# Altium PCB AND_4x4.PcbDoc
Units mil, origin at the board's own origin, x right, y up, seen from the top; angles counter-clockwise.
Board outline 3165 x 2605 mil, 2 copper layers (Top Layer, Bottom Layer); 10 components, 11 nets, 38 pads, 4 vias.
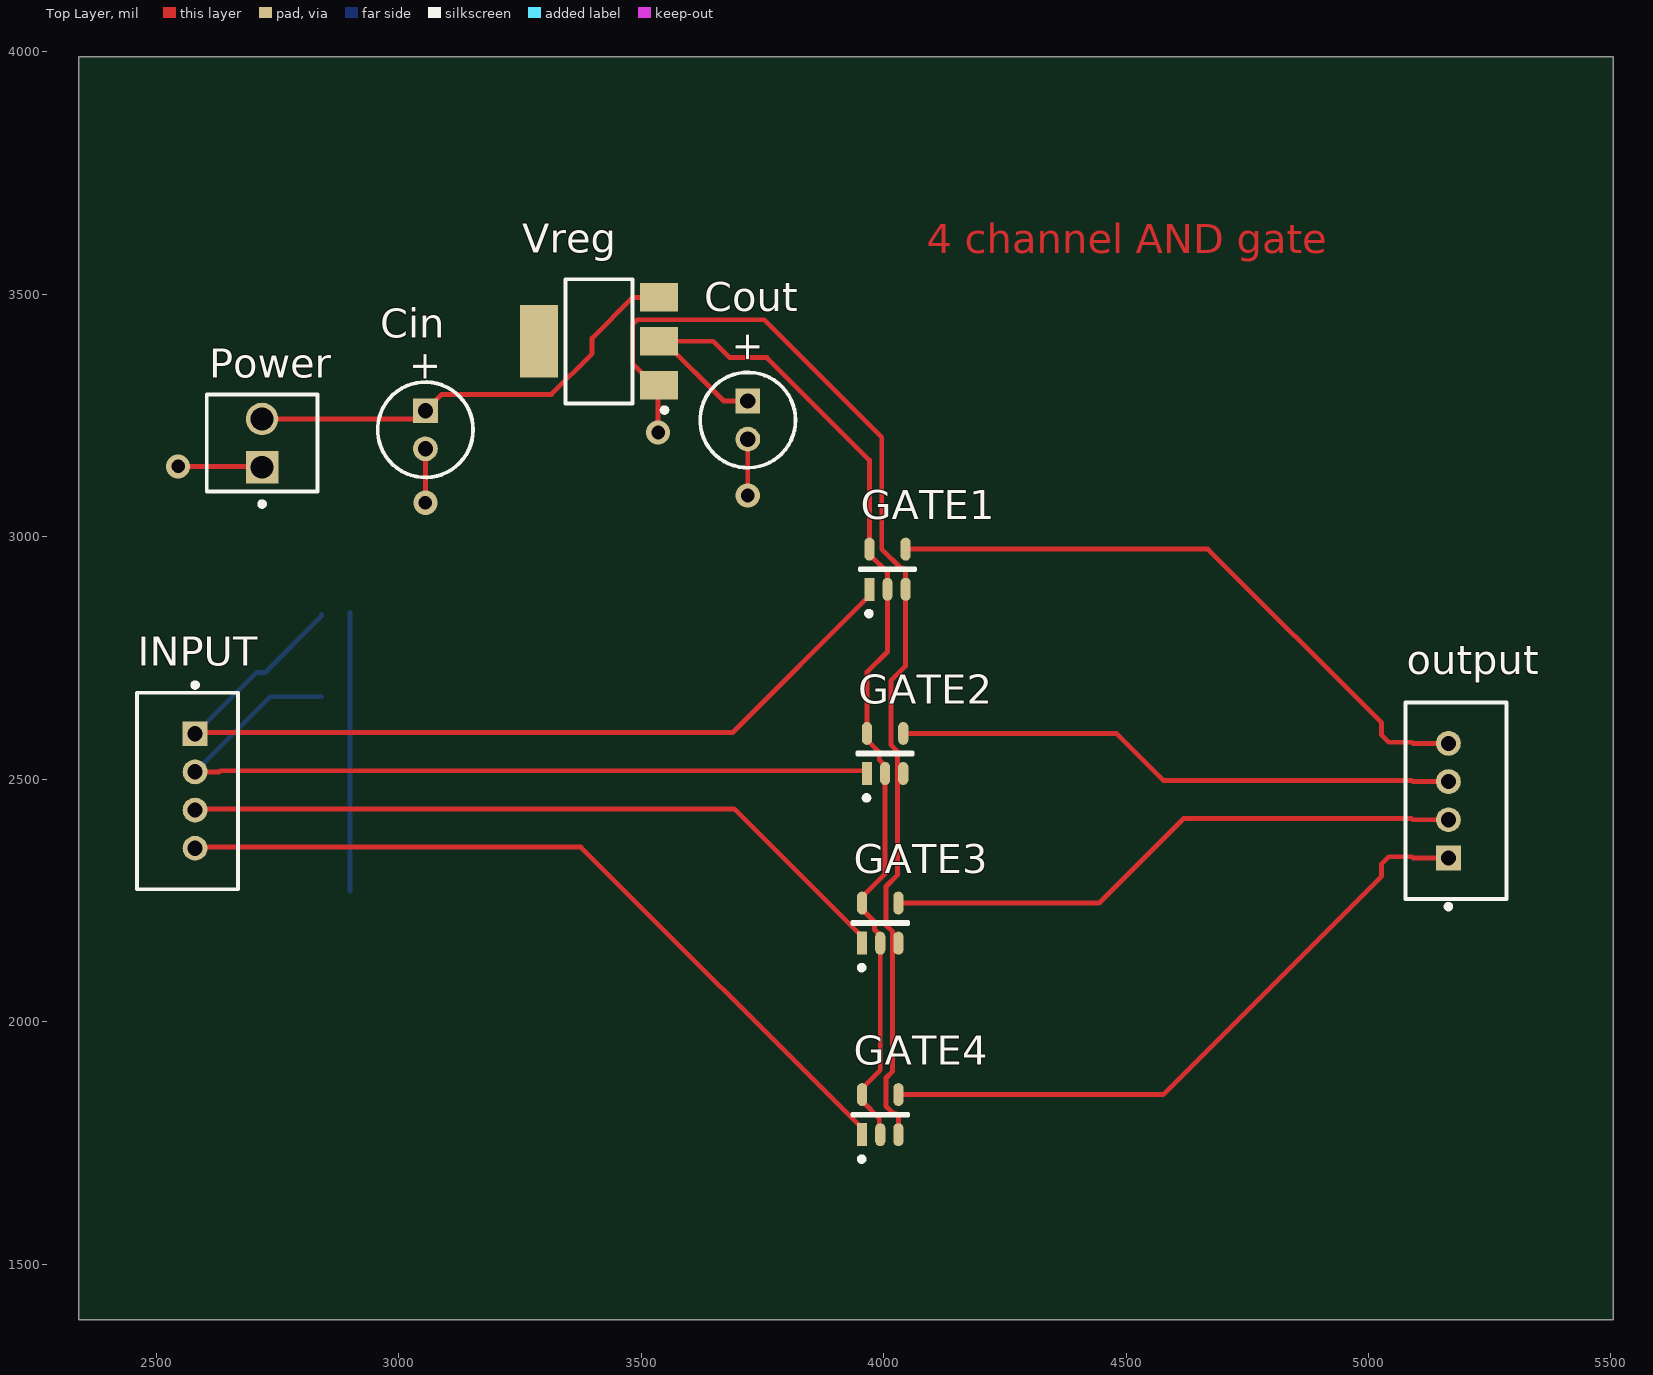
[diagram p0: Top Layer view]
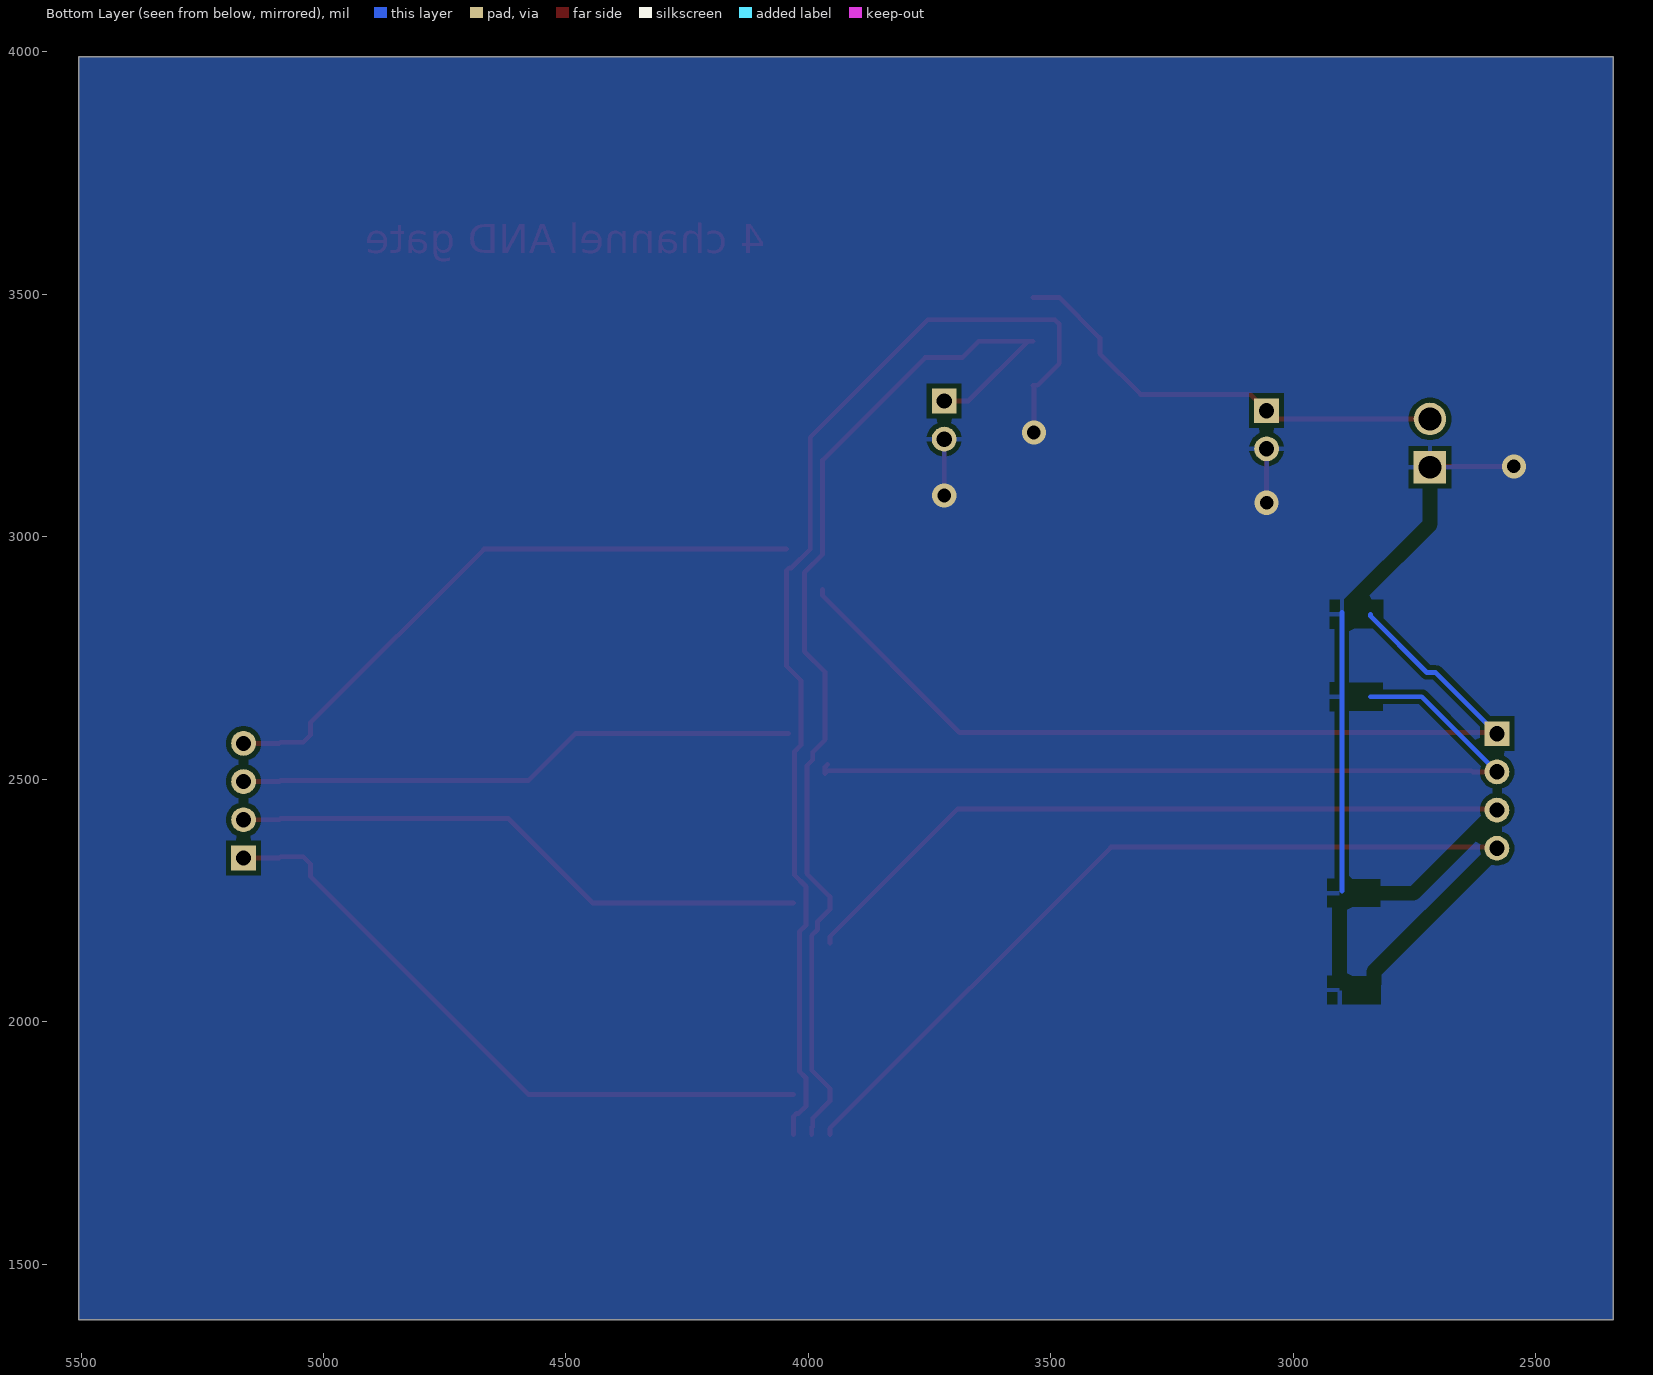
[diagram p1: Bottom Layer view, seen from below]

## Layer stack, top to bottom
Top Solder: solder mask 0.4, Solder Resist, Dk 3.5
Top Layer: signal copper 1.4
Dielectric 1: dielectric 12.6, FR-4, Dk 4.8
Bottom Layer: signal copper 1.4
Bottom Solder: solder mask 0.4, Solder Resist, Dk 3.5

## Board outline
2340,1385 5505,1385 5505,3990 2340,3990

## Design rules (kind name [scope] priority, off if disabled: settings)
Clearance [All] p1: gap=10 ignorepadtopadclearanceinfootprint=FALSE except(0: Arc-Hole Track-Hole SMDPad-Hole THPad-Hole Via-Hole Fill-Hole Poly-Hole Region-Hole Text-Hole)
PolygonConnect [All] p1: connectstyle=Relief reliefconductorwidth=10 reliefentries=4 polygonreliefangle="90 Angle" airgapwidth=10
RoutingVias [All] p1: holewidth=28 width=50 viastyle="Through Hole" minholewidth=28 minwidth=50 maxholewidth=28 maxwidth=50
SolderMaskExpansion [All] p1: expansion=4 istentingtop=FALSE
SupplyNets "Schematic Supply Nets" [InNet('GND')] p1: voltage=0.000
Width [All] p1: maxlimit=10 minlimit=10 preferedwidth=10
30 further rules are at their usual default settings.

## Components (designator, comment, footprint, x,y, rotation, side; value= is the part's Value field where it differs from the comment)
Cin "ECA1HM100" CAPPR55-200-1100X500X1200 3055,3220.63 r270 top value=10µF
Cout "ECA1HM100" CAPPR55-200-1100X500X1200 3720,3240.63 r270 top value=10µF
GATE1 "SN74AUP1G08DBVR" FP-DBV0005A-IPC_C 4008.13,2933.01 r90 top
GATE2 "SN74AUP1G08DBVR" FP-DBV0005A-IPC_C 4003.13,2553.01 r90 top
GATE3 "SN74AUP1G08DBVR" FP-DBV0005A-IPC_C 3993.13,2203.01 r90 top
GATE4 "SN74AUP1G08DBVR" FP-DBV0005A-IPC_C 3993.13,1808.01 r90 top
INPUT "110990030" FP-110990030-MFG 2564.25,2475.63 r270 top
output "110990030" FP-110990030-MFG 5180.75,2455.63 r90 top (schematic designator OUTPUT)
Power "22-27-2021" MOLX-22-27-2021_V 2718.13,3193.01 r90 top
Vreg "NCP1117ST33T3G" ONSC-SOT-223-4-318H-01_A_V 3413.13,3403.01 r180 top

## Footprints (in the part's own frame and the unit in brackets; to place one, negate y for a bottom-side part, rotate by r counter-clockwise, add the part's x,y. Pads: shape width x height; smd on the part's side, far side on the other; paste and mask are expansions set on the pad)
CAPPR55-200-1100X500X1200 [mm] "THD, 2-Leads, Dia 5mm, Pin Spacing 2mm"
  rect 1.3x1.3 hole 0.8: 1(-1,0)
  round 1.3 hole 0.8: 2(1,0)
  silkscreen extent -2.5,-2.5 2.5,2.5, body extent -2.5,-2.5 2.45,2.5, height 12
FP-110990030-MFG [mm]
  rect 1.3x1.3 hole 0.8 paste-2539.97 mask+0: 1(-3,0.4)
  round 1.3 hole 0.8 paste-2539.97 mask+0: 2(-1,0.4) 3(1,0.4) 4(3,0.4)
  silkscreen extent -5.67,-2.65 5.15,2.65, body extent -5.25,-2.75 5.25,2.75, height 0.25
FP-DBV0005A-IPC_C [mm]
  rect 1.205x0.532 smd paste+0 mask+0: 1(-1.05,0.95)
  rrect100% 1.205x0.532 smd paste+0 mask+0: 2(-1.05,0) 3(-1.05,-0.95) 4(1.05,-0.95) 5(1.05,0.95)
  silkscreen extent -2.45,-1.45 0.05,1.45, body extent -1.75,-1.55 1.75,1.55, height 0.25
MOLX-22-27-2021_V [mm] "Header, 2-Leads, Body 5.8x5.08mm"
  rect 1.7x1.7 hole 1.19: 1(-1.27,0)
  round 1.7 hole 1.19: 2(1.27,0)
  silkscreen extent -3.31,-2.9 2.54,2.9, body extent -2.54,-2.9 2.54,2.9, height 11.72
ONSC-SOT-223-4-318H-01_A_V [mm] "SOT223, 4-Leads, Body 6.5x3.5mm, Pitch 2.3mm"
  rect 2x1.5 smd: 1(-3.15,2.3) 2(-3.15,0) 3(-3.15,-2.3)
  rect 2x3.8 smd: 4(3.15,0)
  silkscreen extent -3.55,-3.25 1.75,3.72, body extent -1.75,-3.25 1.75,3.25, height 1.8

## Part data
Cin Cout: library part CMP-001-00025-7, "Aluminum Electrolytic Capacitor, 10 uF, +/- 20%, 50 V, -40 to 85 degC, 2-Pin THD, RoHS, Bulk", Capacitor Type=Electrolytic, Case/Package=Radial, Manufacturer=Panasonic, Max Operating Temperature=85°C, Min Operating Temperature=-40°C, Package Description="2-Pin Radial Lead, Dia 5 mm, Height 12 mm", Package Quantity=200, Package Reference=CAPPR55-200-1100X500X1200, Ripple Current=65mA, Tolerance=20%, Voltage Rating=50V, Datasheet URL=https://industrial.panasonic.com/cdbs/www-data/pdf/RDF0000/ABA0000C1218.pdf, Datasheet Version="Rev. 05, 10/2016", Diameter=5mm, Lead Pitch=2mm, Manufacturer URL=http://www.panasonic.com/, Mounting Technology=TH, Packaging=Bulk, Pins=2, Ripple Current (AC)=65mA, RoHS Compliant=True
GATE1 GATE2 GATE3 GATE4: library part CMP-0859-00066-4, "IC GATE AND 1CH 2-INP SOT23-5", Case/Package=SOT-23, High Level Output Current=-4mA, Low Level Output Current=4mA, Max Operating Temperature=85°C, Max Supply Voltage=3.6V, Min Operating Temperature=-40°C, Min Supply Voltage=800mV, Package Quantity=3000, Quiescent Current=500nA, Contact Plating=Tin, Input Type="SCHMITT TRIGGER", Lead Free="Lead Free", Logic Function="AND GATE", Mount="Surface Mount", Number of Bits=1, Number of Circuits=1, Number of Elements=1, Number of Gates=1, Number of Input Lines=2, Number of Inputs=2, Number of Output Lines=1, Number of Outputs=1, Number of Pins=5, Output Current=4mA, Packaging="Tape and Reel", Propagation Delay=6.2ns, Radiation Hardening=No, REACH SVHC="No SVHC", RoHS Compliant=Yes, Series=74AUP, Technology=CMOS, Turn-On Delay Time=20.9ns, Weight=0.000395oz
INPUT output: library part CMP-139044-000001-1, "GROVE 2MM 4PIN VERT CONN 10PCS", Series=-
Power: library part CMP-2000-05537-1, "Male Header, Pitch 2.54 mm, 1 x 2 Position, Height 11.7 mm, Tail Length 3.56 mm, 0 to 75 degC, RoHS, Bulk", Current - Max=4A, Manufacturer=Molex, Operating temperature=0°Cto+75°C, Package Description="2-Leads Header, Body 5.08 x 5.8 mm, Pitch 2.54 mm", Package Version="Rev. BC, 02/2012", PartNumber=0022272021, Voltage - Max=250V, Contact Material=Tinplatedbrass, Current Rating=4A, Datasheet URL=http://www.molex.com/pdm_docs/sd/022272021_sd.pdf, Datasheet Version="Rev. F, 06/2009", Housing Material=Nylon(UL94V-0), Manufacturer URL=http://www.molex.com/, Mounting Technology=ThroughHole, No. of Positions=2, No. of Rows=1, Orientation=Vertical, Package Reference=22-27-2021, Pitch=2.54mm, Voltage Rating=250V
Vreg: library part CMP-1679-00010-1, "Low-Dropout Positive Fixed Voltage Regulator, 1 A, 3.3 V Output Voltage, 0 to 125 degC, 4-Pin SOT-223 (318H-01), Pb-Free, Tape and Reel", Case Code (Imperial)=0603, Case Code (Metric)=1608, Max Operating Temperature="155 degC", Min Operating Temperature="-55 degC", Package Quantity=5000, Power Rating="100 mW", Resistance="220 kohm", Tolerance=1%, Type (Resistor)="Thick Film", Voltage Rating="75 V", Case\Package=0603, ComponentLink1Description="Manufacturer URL", ComponentLink1URL=http://www.onsemi.com/, ComponentLink2Description=Datasheet, ComponentLink2URL=http://www.onsemi.com/pub_link/Collateral/NCP1117-D.PDF, DatasheetVersion="Rev. 27, 09/2014", Height="0.45 mm", Length="1.55 mm", Mount="Surface Mount", PackageDescription="4-Pin Small Outline Transistor, Body 6.5 x 3.5 mm, Pitch 2.3 mm", PackageReference=SOT-223-4-318H-01_A, Packaging="Tape and Reel", Radiation Hardening=No, REACH SVHC=Unknown, RoHSCompliant=true, Weight="7.1E-05 oz", Width="0.85 mm"

## Via types
v1: diameter 50, hole 28, Top Layer to Bottom Layer, 4 vias

## Nets (pads, with @x,y where several pads share a name; then routed paths per layer and width w, separated by ;. In a path a pad name is that pad's centre, name@x,y a point inside that pad or via, vN(x,y) a via of type N, cw(c..) or ccw(c..) an arc to the next point about the centre after c; other vN are vias at no path point)
GND: Cin.2 Cout.2 GATE1.3 GATE2.3 GATE3.3 GATE4.3 Power.1 Vreg.1 | length 3360.3
  Top Layer w10: v1(2545,3145) 2716.14,3145 Power.1 ; v1(3055,3070) Cin.2 ; v1(3535,3215) 3535,3310.32 Vreg.1 3527.3,3312.46 3482.78,3356.99 3482.78,3438.75 3491.56,3447.54 3753.59,3447.54 3996.2,3204.93 3996.2,2974.42 4034.98,2935.64 4039.67,2935.64 4045.53,2929.79 GATE1.3 4045.53,2733.47 4015.06,2702.99 4015.06,2570.57 4028.61,2557.02 4028.61,2302.21 4005.06,2278.66 4005.06,2199.01 4018.61,2185.46 4018.61,1897.21 4005.06,1883.66 4005.06,1825.57 4019.98,1810.64 4024.67,1810.64 4030.53,1804.79 GATE4.3 ; v1(3720,3085) Cout.2
  Bottom Layer w10: 2899.53,2269.53 2899.53,2670 2899.53,2840 2899.53,2843.94
NetCin_1: Cin.1 Power.2 Vreg.3 | length 941.7
  Top Layer w10: Power.2 3038.01,3243.01 Cin.1 3088.48,3293.48 3314.97,3293.48 3398.87,3377.38 3398.87,3409.66 3482.78,3493.56 Vreg.3
NetCout_1: Cout.1 GATE1.2 GATE1.5 GATE2.2 GATE2.5 GATE3.2 GATE3.5 GATE4.2 GATE4.5 Vreg.2 | length 2264.2
  Top Layer w10: Vreg.2 Vreg.2@3546.99,3403.01 ; Cout.1 3670,3280 Vreg.2@3546.99,3403.01 ; GATE4.2@3991.04,1782.87 3991.04,1800.81 3955.73,1836.12 GATE4.5 3955.73,1862.62 3993.13,1900.02 GATE3.2 3993.13,2177.87 3981.2,2189.79 3981.2,2205.64 3955.73,2231.12 GATE3.5 3955.73,2257.62 4003.13,2305.02 GATE2.2 4003.13,2527.87 3991.2,2539.79 3991.2,2555.64 3965.73,2581.12 GATE2.5 3965.73,2720.76 4008.13,2763.17 GATE1.2 4008.13,2926.68 3970.73,2964.08 GATE1.5 3970.73,3158.01 3759.41,3369.33 3682.3,3369.33 3648.62,3403.01 Vreg.2@3546.99,3403.01 ; GATE4.2 GATE4.2@3993.13,1782.87
NetGATE1_1: GATE1.1 INPUT.1 | length 1886.7
  Top Layer w10: INPUT.1 2582.38,2596.12 3688.45,2596.12 3970.73,2878.4 GATE1.1
  Bottom Layer w10: INPUT.1 2706.08,2719.82 2724.23,2719.82 2840.47,2836.06 2840.47,2840
NetGATE1_4: GATE1.4 output.4 | length 1300.1
  Top Layer w10: GATE1.4 4668.77,2974.37 5027.19,2615.96 5027.19,2590.81 5041.87,2576.12 5089.11,2576.12 5091.5,2573.74 output.4
NetGATE2_1: GATE2.1 INPUT.2 | length 1734.7
  Top Layer w10: INPUT.2 2629.76,2515 2632.15,2517.38 3960.25,2517.38 GATE2.1@3965.73,2511.91 ; GATE2.1@3960.25,2530.38 3965.73,2524.9 GATE2.1@3965.73,2511.91 ; GATE2.1 GATE2.1@3965.73,2511.91
  Bottom Layer w10: INPUT.2 2735,2670 2840.47,2670
NetGATE2_4: GATE2.4 output.3 | length 1165.6
  Top Layer w10: GATE2.4 4480.22,2594.37 4577.21,2497.38 5089.11,2497.38 5091.5,2495 output.3
NetGATE3_1: GATE3.1 INPUT.3 | length 1499.2
  Top Layer w10: INPUT.3 2582.38,2438.64 3691.99,2438.64 3955.73,2174.9 GATE3.1
NetGATE3_4: GATE3.4 output.2 | length 1207.6
  Top Layer w10: GATE3.4 4444.25,2244.37 4618.52,2418.64 5089.11,2418.64 5091.5,2416.26 output.2
NetGATE4_1: GATE4.1 INPUT.4 | length 1630.2
  Top Layer w10: INPUT.4 2582.38,2359.9 3375.73,2359.9 3955.73,1779.9 GATE4.1
NetGATE4_4: GATE4.4 output.1 | length 1353.4
  Top Layer w10: GATE4.4 4576.49,1849.37 5027.19,2300.07 5027.19,2325.22 5041.87,2339.9 5089.11,2339.9 5091.5,2337.52 output.1
pads on no net: Vreg.4

## Polygon pours and split planes (outlines as drawn)
GND on Bottom Layer "GND_POUR" (solid, pour order 0): 2340,1385 5505,1385 5505,3990 2340,3990

## Other copper
Top Layer:
  text "4 channel AND gate" at 4089.25,3584.36 h60

## Silkscreen, mask and mechanical layers (free items; w line width, h text height)
Board Outline:
  lines w10: 2340,1385 5505,1385 ; 2340,3990 5505,3990 ; 5500,2745 5505,2745 ; 6940,2630 6955,2630 ; 5505,1385 5505,3990 ; 5505,1385 5505,3990

## Text inside footprints (layer, text, board x,y; h text height)
Cin: Top Overlay "+" at 3030,3385 h59.06 r270
Cout: Top Overlay "+" at 3695,3425 h59.06 r270